# EAGLE board AgriculturaVertical (EAGLE 9.1.0)
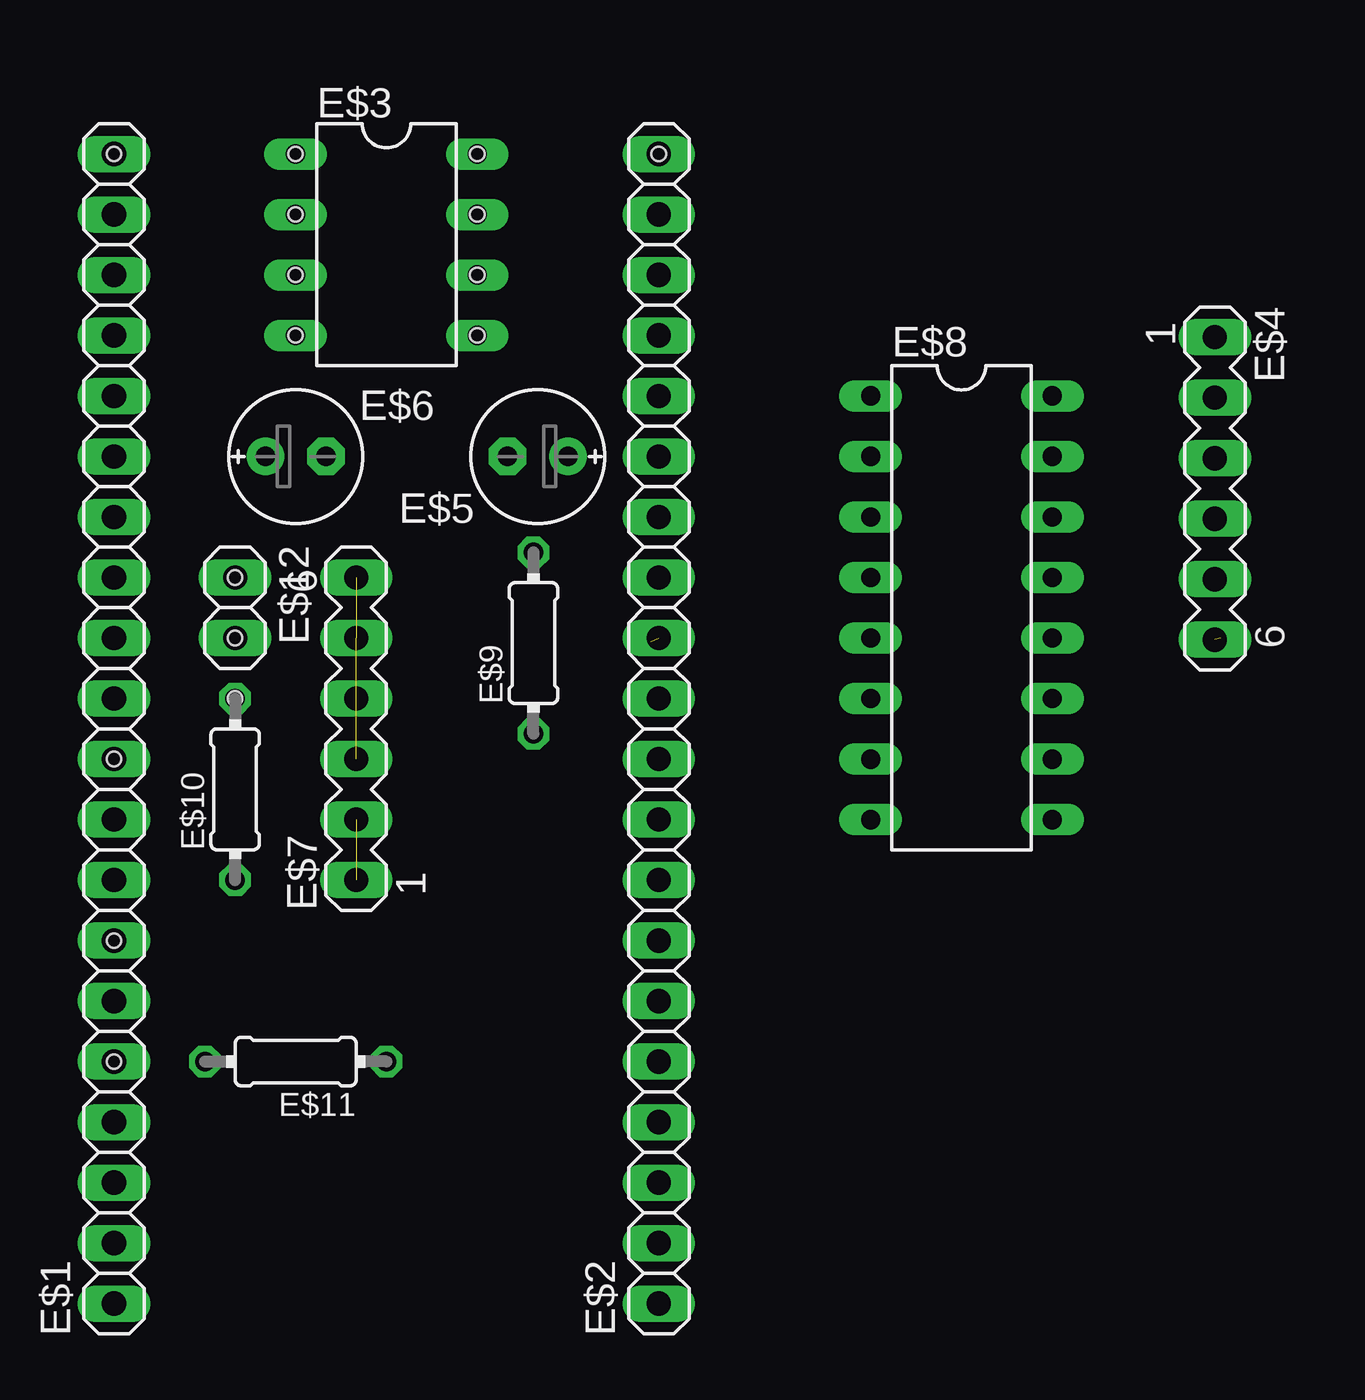
[diagram p0: board, top side]
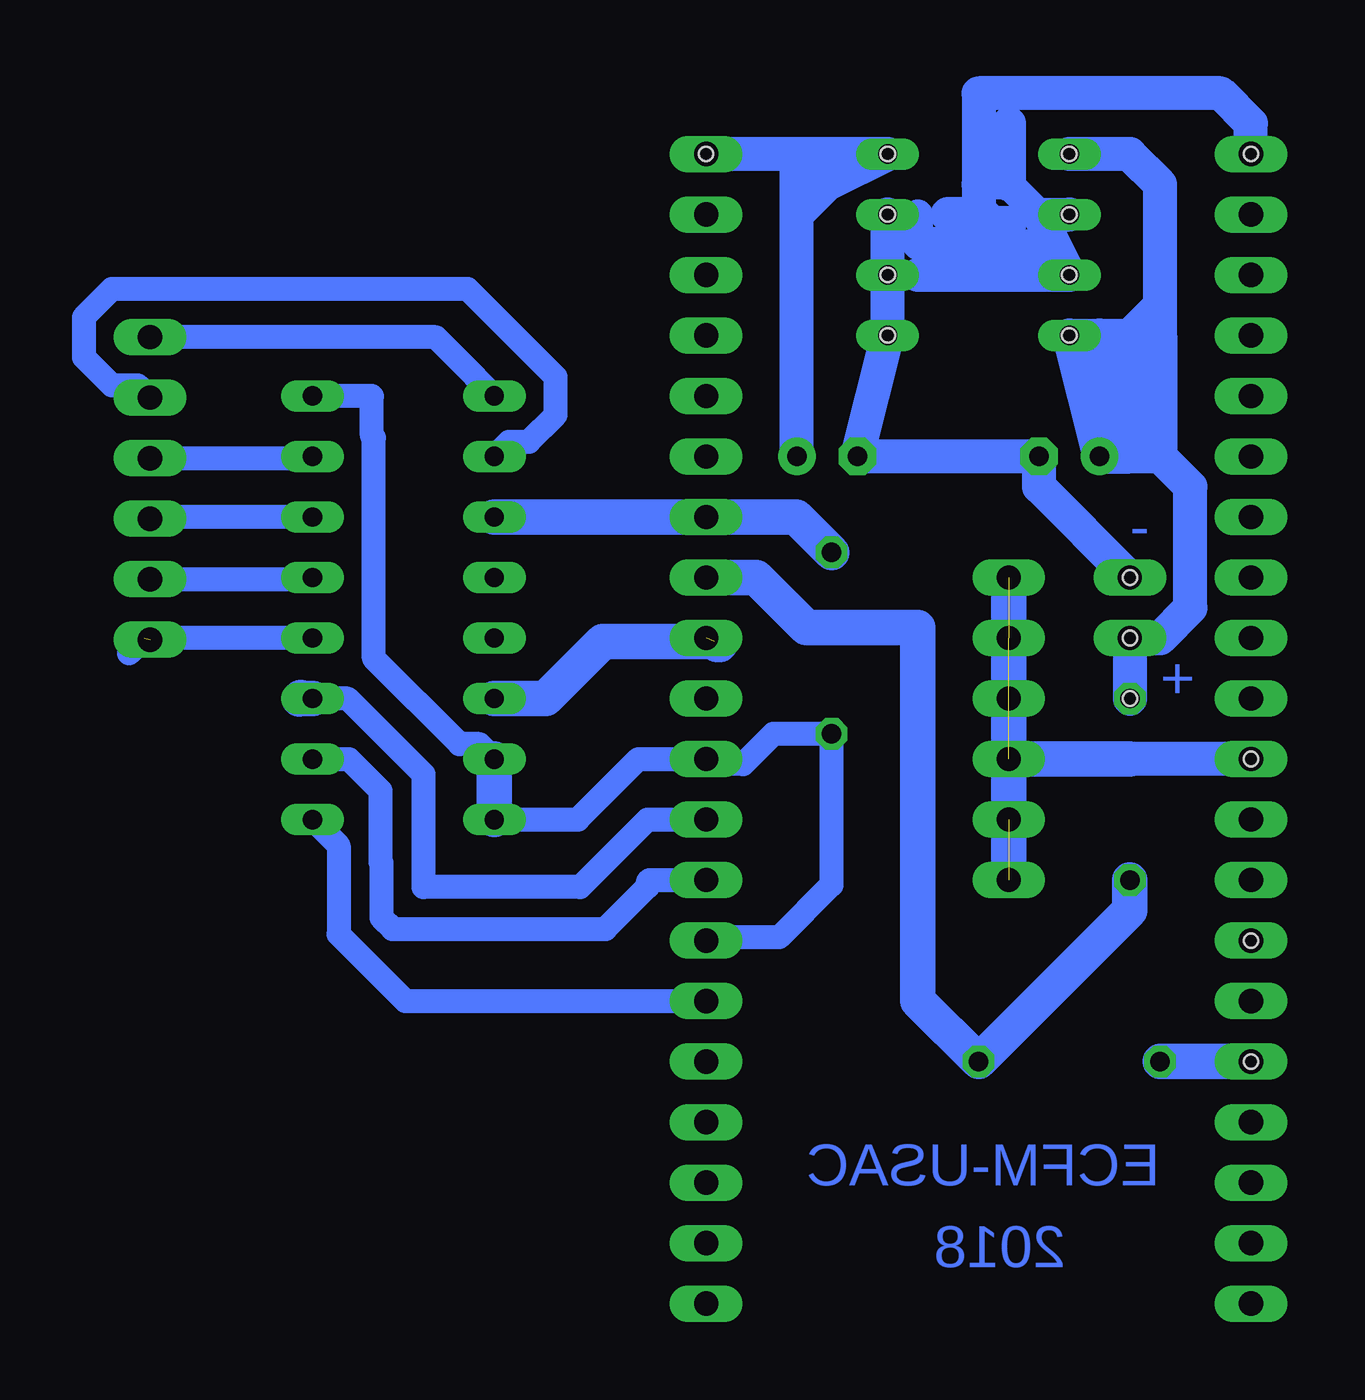
[diagram p1: board, bottom side, seen from below]

No outline drawn. Coordinates in mm, seen from the top.
Copper layers (1*16): Top 0.035mm / dielectric 1.5mm / Bottom 0.035mm
Design rules "default": minimum track width 10mil, minimum drill 24mil, track to track 8mil, track to pad 8mil, pad to pad 8mil, via to via 8mil, smd to smd 8mil, copper to edge 40mil, drill to drill 8mil, minimum pad ring 10mil, minimum via ring 8mil, stop-mask expansion 4mil, vias tented up to drill 0mil, thermal gap 10mil
Net classes: 0 default: width 1 mm, clearance 0.75 mm
Holes 0.6 mm at 43.18,27.94 43.18,35.56 43.18,60.96 66.04,60.96 58.42,60.96 50.8,60.96 50.8,58.42 50.8,55.88 50.8,53.34 58.42,53.34 58.42,55.88 58.42,58.42 48.26,38.1 48.26,40.64 48.26,43.18 43.18,22.86

## Footprints (pad centres in the part's own frame; a part is rotated, then mirrored left to right if it is on the bottom)
1X20 = drill 1.016 long: 1 -24.13,0; 2 -21.59,0; 3 -19.05,0; 4 -16.51,0; 5 -13.97,0; 6 -11.43,0; 7 -8.89,0; 8 -6.35,0; 9 -3.81,0; 10 -1.27,0; 11 1.27,0; 12 3.81,0; 13 6.35,0; 14 8.89,0; 15 11.43,0; 16 13.97,0; 17 16.51,0; 18 19.05,0; 19 21.59,0; 20 24.13,0
DIL08 = drill 0.813 long: 1 -3.81,-3.81; 2 -1.27,-3.81; 3 1.27,-3.81; 4 3.81,-3.81; 5 3.81,3.81; 6 1.27,3.81; 7 -1.27,3.81; 8 -3.81,3.81
MA06-1 = drill 1.016 long: 1 -6.35,0; 2 -3.81,0; 3 -1.27,0; 4 1.27,0; 5 3.81,0; 6 6.35,0
E2,5-6E = drill 0.813 pad 1.575: + -1.27,0 | drill 0.813 pad 1.575 octagon: - 1.27,0
DIL16 = drill 0.813 long: 1 -8.89,-3.81; 2 -6.35,-3.81; 3 -3.81,-3.81; 4 -1.27,-3.81; 5 1.27,-3.81; 6 3.81,-3.81; 7 6.35,-3.81; 8 8.89,-3.81; 9 8.89,3.81; 10 6.35,3.81; 11 3.81,3.81; 12 1.27,3.81; 13 -1.27,3.81; 14 -3.81,3.81; 15 -6.35,3.81; 16 -8.89,3.81
0204/7 = drill 0.813 octagon: 1 -3.81,0; 2 3.81,0
1X02 = drill 1.016 long: 1 -1.27,0; 2 1.27,0

## Placement (x,y rotation side)
E$1  [1X20]  43.18,36.83 90 top
E$2  [1X20]  66.04,36.83 90 top
E$3  [DIL08]  54.61,57.15 270 top
E$4  [MA06-1]  89.37,46.92 270 top
E$5  [E2,5-6E]  60.96,48.26 180 top
E$6  [E2,5-6E]  50.8,48.26 0 top
E$7  [MA06-1]  53.34,36.83 90 top
E$8  [DIL16]  78.74,41.91 270 top
E$9  [0204/7]  60.78,40.43 90 top
E$10  [0204/7]  48.26,34.29 90 top
E$11  [0204/7]  50.8,22.86 180 top
E$12  [1X02]  48.26,41.91 270 top

## Library data of the parts
E$1 E$2 E$12 = pinhead
E$3 = 74ac-logic
E$4 E$7 = con-lstb
E$5 E$6 = rcl
E$8 = analog-devices-3
E$9-E$11 = resistor

## Nets
S$1: E$2.20 E$3.8 E$5.+
S$2: E$1.10 E$7.1 E$7.2 E$7.3 E$7.4 E$7.5 E$7.6
S$3: E$3.1 E$3.4 E$6.+ E$10.2 E$12.2
S$4: E$1.5 E$11.2
S$6: E$2.13 E$10.1 E$11.1
S$7: E$2.7 E$2.10 E$8.7 E$8.8 E$8.16 E$9.1
S$8: E$2.14 E$8.3 E$9.2
S$9: E$2.6 E$8.9
S$10: E$2.8 E$8.10
S$11: E$3.5 E$3.6 E$3.7 E$5.- E$6.- E$12.1
S$13: E$4.1 E$8.1
S$14: E$1.20 E$3.2 E$3.3
S$15: E$4.2 E$8.2
S$16: E$4.3 E$8.15
S$17: E$4.4 E$8.14
S$18: E$4.5 E$8.13
S$20: E$4.6 E$8.12
S$21: E$2.9 E$8.11
S$22: E$2.12 E$8.6

## Tracks (layer width: path | path; a pad name or v marks a point on that pad's centre or on a via)
S$1
  Bottom 1.422: 62.23,60.96 E$3.8 60.96,59.69 | 62.23,60.96 E$2.20 | 60.96,59.69 62.23,58.42 E$5.+ 62.23,60.96 | 62.23,60.96 60.96,59.69
S$2  (4 unrouted)
  Bottom 1.422: E$1.10 48.26,35.56 50.8,35.56
  Bottom 1.5: E$7.3 48.26,35.56 | E$7.1 E$7.6
S$3
  Bottom 1.27: 49.53,53.34 49.53,50.8 49.53,49.53 48.26,48.26
  Bottom 1.422: 48.26,53.34 49.53,53.34 E$3.4 E$6.+ 48.26,48.26 | 48.26,53.34 46.99,54.61 | 46.99,54.61 46.99,59.69 48.26,60.96 E$3.1 | 48.26,48.26 48.26,53.34 | 48.26,53.34 46.99,53.34 46.99,48.26 | 46.99,48.26 48.26,48.26 | 48.26,48.26 46.99,49.53 46.99,54.61 | 46.99,48.26 45.72,46.99 45.72,41.91 46.99,40.64 E$12.2 E$10.2
S$4
  Bottom 1.5: E$1.5 E$11.2
S$5
  Bottom 1.422: 53.34,62.23 53.34,59.69
S$6
  Bottom 1.5: E$10.1 48.26,29.21 E$11.1 57.16,25.41 57.16,41.09 61.84,41.09 63.93,43.18 E$2.13
S$7
  Bottom 1: E$8.7 75.56,36.19 76.38,36.19 79.98,39.79 79.98,49.05 80.06,49.14 80.06,50.78 80.08,50.8 E$8.16 | E$8.8 71.43,33.02 68.89,35.56 E$2.10 65.83,35.34 64.49,35.34 63.22,36.62 E$9.1 60.78,30.27 62.98,28.08 65.9,28.08 E$2.7
  Bottom 1.5: E$8.7 E$8.8
S$8
  Bottom 1.5: E$8.3 E$2.14 62.26,45.72 E$9.2
S$9
  Bottom 1: E$8.9 81.46,31.93 81.46,28.2 78.66,25.4 E$2.6
S$10
  Bottom 1.016: E$8.10 81.03,35.56 79.7,34.24 79.7,31.24 79.67,31.2 79.67,28.89 79.19,28.42 70.27,28.42 68.48,30.21 68.48,30.42 68.42,30.48 E$2.8
S$11
  Bottom 1.422: E$3.7 E$3.6 E$3.5 | E$3.5 58.42,54.61 | E$3.5 E$5.- E$6.- 52.07,46.99 E$12.1
S$13
  Bottom 1.016: E$8.1 75.74,51.61 75.74,51.63 77.38,53.27 E$4.1
S$14
  Bottom 1.27: 52.07,57.15 56.77,57.15 57.15,57.15 57.15,58.42 | 52.07,58.42 53.34,59.69 54.61,59.69
  Bottom 1.422: E$1.20 43.18,62.23 44.45,63.5 54.61,63.5 54.61,59.69 54.61,57.15 | E$3.2 52.07,58.42 E$3.3 57.15,55.88
  Bottom 1.5: 54.61,57.15 53.73,58.03 | 53.73,58.03 53.34,58.03 54.22,57.15 56.77,57.15 | 55.88,58.42 54.42,58.42 54.03,58.03 53.73,58.03
S$15
  Bottom 1.016: E$8.2 74.31,48.88 73.47,48.88 72.35,50.01 72.35,51.59 76.04,55.29 90.97,55.29 92.16,54.1 92.16,52.43 90.97,51.25 89.89,51.25 E$4.2
S$16
  Bottom 1.016: E$4.3 82.62,48.19 E$8.15
S$17
  Bottom 1.016: E$8.14 89.3,45.72 E$4.4
S$18
  Bottom 1.016: E$4.5 82.62,43.11 E$8.13
S$20  (1 unrouted)
  Bottom 1.016: E$8.12 89.61,40.64 90.25,40
S$21
  Bottom 1: 82.06,38.1 81.08,38.1 77.9,34.92 77.9,30.19
  Bottom 1.016: 77.9,30.19 71.33,30.19 68.5,33.02 E$2.9 | 82.06,38.1 E$8.11
  Bottom 1.5: 83.06,38.14 83.1,38.1 | 83.11,38.09 83.1,38.1 | 83.1,38.1 E$8.11
S$22  (1 unrouted)
  Bottom 1.5: E$8.6 72.78,38.1 70.39,40.49 65.7,40.49 65.57,40.36 65.47,40.36

## Text on the board
Bottom: - | + | ECFM-USAC | 2018